# EAGLE board Board (EAGLE 9.6.2)
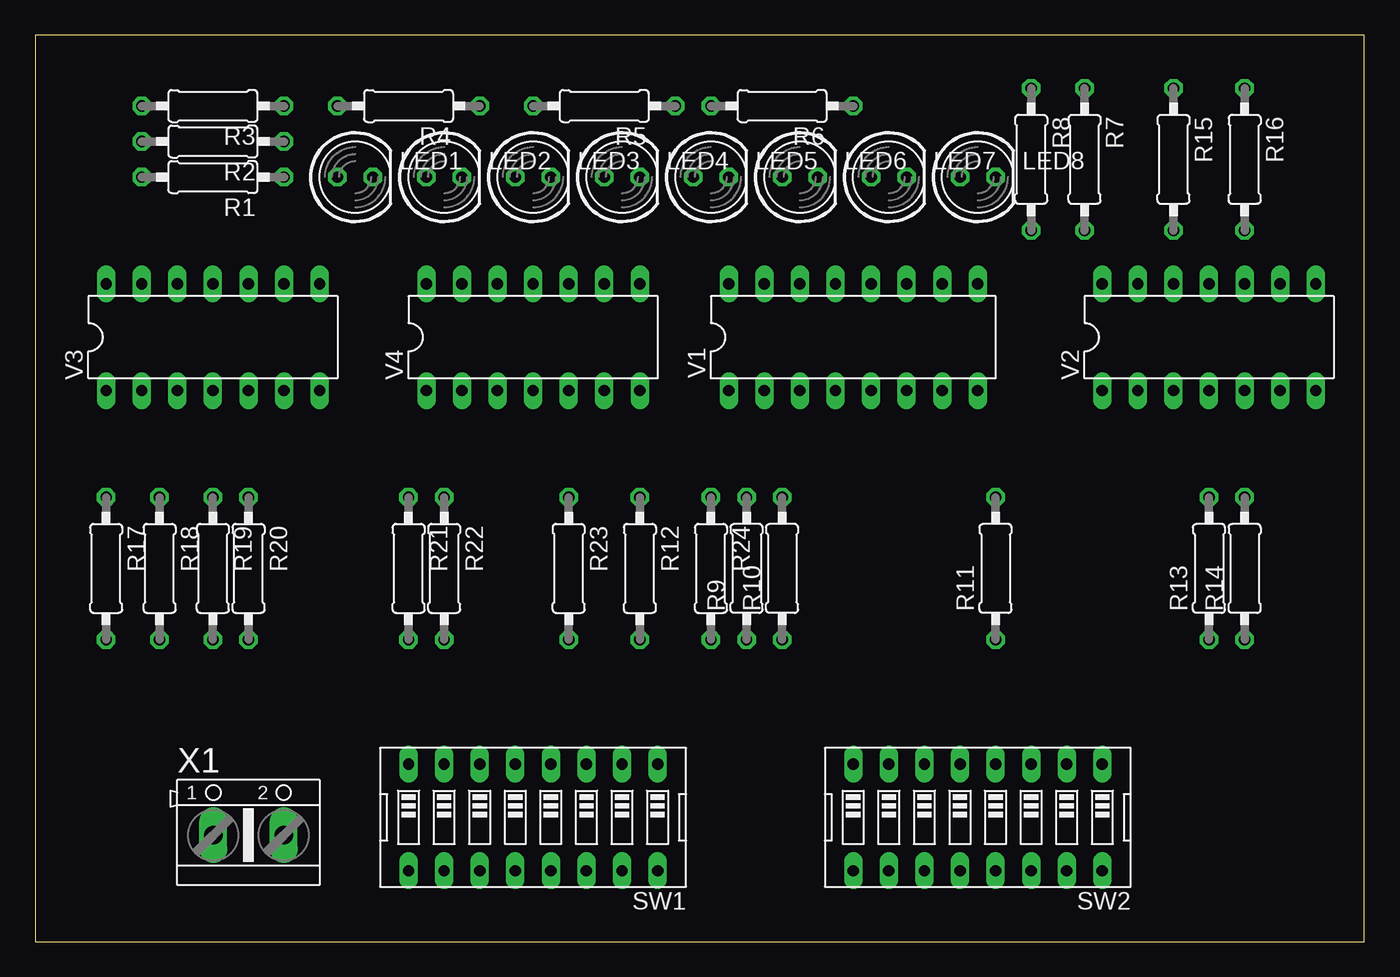
[diagram p0: board, top side]
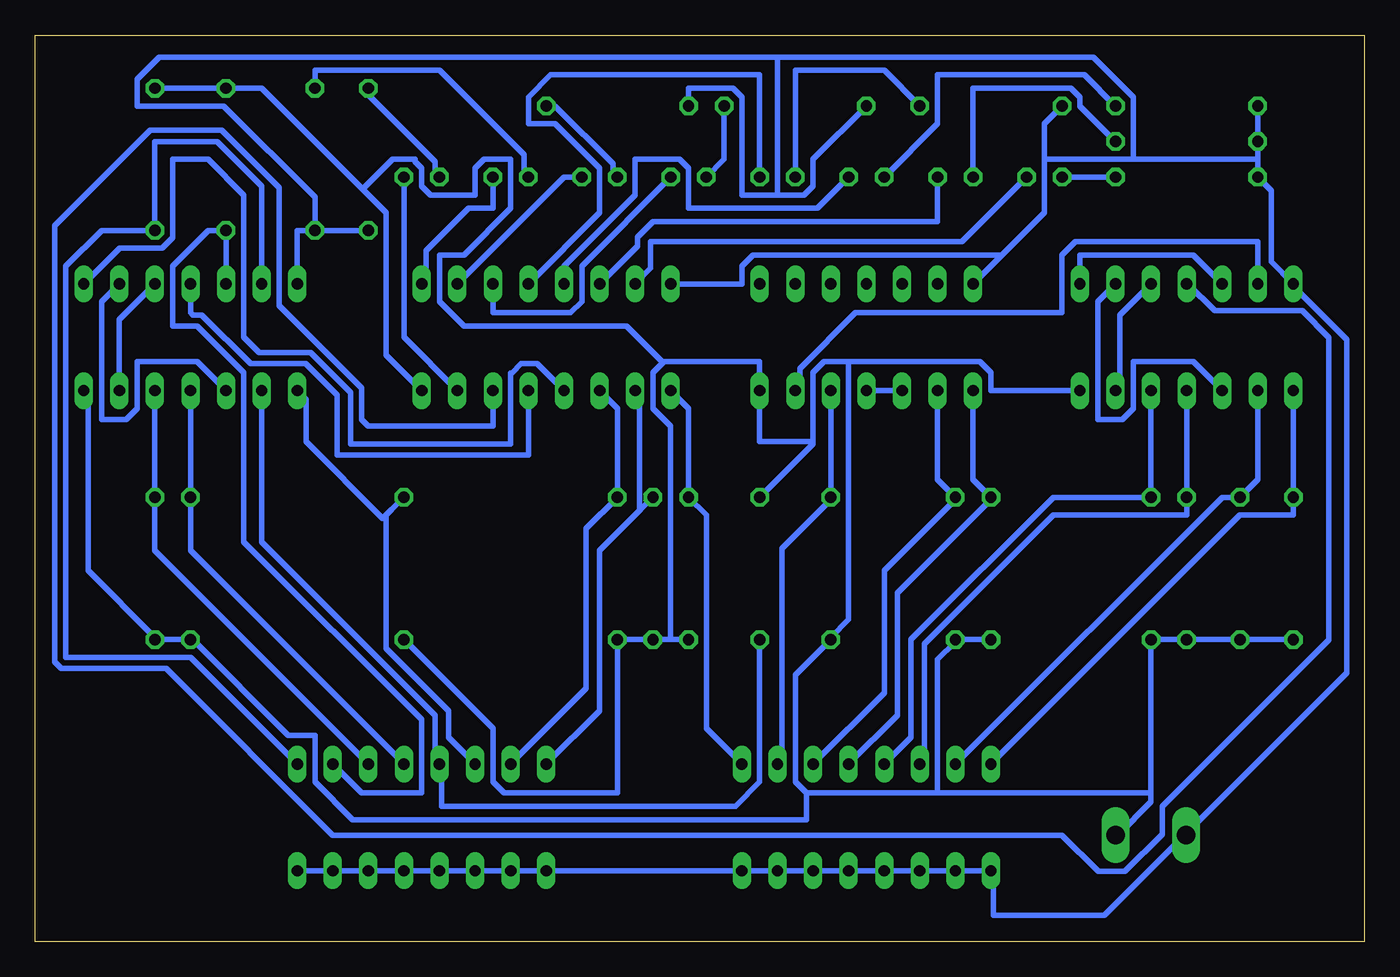
[diagram p1: board, bottom side, seen from below]

Size 94.92 x 64.76 mm. Coordinates in mm from the lower left corner, seen from the top.
Outline: 0,0 94.92,0 94.92,64.76 0,64.76 0,0
Copper layers (1*16): Top 0.035mm / dielectric 1.5mm / Bottom 0.035mm
Design rules "default *": minimum track width 0.4mm, minimum drill 0.35mm, track to track 0.4mm, track to pad 0.4mm, pad to pad 0.4mm, via to via 0.4mm, smd to smd 6mil, copper to edge 40mil, drill to drill 6mil, minimum pad ring 10mil, minimum via ring 8mil, stop-mask expansion 4mil, vias tented up to drill 0mil, thermal gap 10mil

## Footprints (pad centres in the part's own frame; a part is rotated, then mirrored left to right if it is on the bottom)
LED5MM = drill 0.813 octagon: A -1.27,0; K 1.27,0
0207/10 = drill 0.813 octagon: 1 -5.08,0; 2 5.08,0
EDG-08 = drill 0.813 long: 1 -8.89,-3.81; 2 -6.35,-3.81; 3 -3.81,-3.81; 4 -1.27,-3.81; 5 1.27,-3.81; 6 3.81,-3.81; 7 6.35,-3.81; 8 8.89,-3.81; 9 8.89,3.81; 10 6.35,3.81; 11 3.81,3.81; 12 1.27,3.81; 13 -1.27,3.81; 14 -3.81,3.81; 15 -6.35,3.81; 16 -8.89,3.81
DIL16 = drill 0.813 long: 1 -8.89,-3.81; 2 -6.35,-3.81; 3 -3.81,-3.81; 4 -1.27,-3.81; 5 1.27,-3.81; 6 3.81,-3.81; 7 6.35,-3.81; 8 8.89,-3.81; 9 8.89,3.81; 10 6.35,3.81; 11 3.81,3.81; 12 1.27,3.81; 13 -1.27,3.81; 14 -3.81,3.81; 15 -6.35,3.81; 16 -8.89,3.81
DIL14 = drill 0.813 long: 1 -7.62,-3.81; 2 -5.08,-3.81; 3 -2.54,-3.81; 4 0,-3.81; 5 2.54,-3.81; 6 5.08,-3.81; 7 7.62,-3.81; 8 7.62,3.81; 9 5.08,3.81; 10 2.54,3.81; 11 0,3.81; 12 -2.54,3.81; 13 -5.08,3.81; 14 -7.62,3.81
AK500/2 = drill 1.321 long: 1 -2.515,0; 2 2.515,0

## Placement (x,y rotation side)
LED1  [LED5MM]  22.86,54.61 0 top
LED2  [LED5MM]  29.21,54.61 0 top
LED3  [LED5MM]  35.56,54.61 0 top
LED4  [LED5MM]  41.91,54.61 0 top
LED5  [LED5MM]  48.26,54.61 0 top
LED6  [LED5MM]  54.61,54.61 0 top
LED7  [LED5MM]  60.96,54.61 0 top
LED8  [LED5MM]  67.31,54.61 0 top
R1  [0207/10]  12.7,54.61 180 top
R2  [0207/10]  12.7,57.15 180 top
R3  [0207/10]  12.7,59.69 180 top
R4  [0207/10]  26.67,59.69 180 top
R5  [0207/10]  40.64,59.69 180 top
R6  [0207/10]  53.34,59.69 180 top
R7  [0207/10]  74.93,55.88 270 top
R8  [0207/10]  71.12,55.88 270 top
R9  [0207/10]  50.8,26.67 90 top
R10  [0207/10]  53.34,26.67 90 top
R11  [0207/10]  68.58,26.67 90 top
R12  [0207/10]  43.18,26.67 270 top
R13  [0207/10]  83.82,26.67 90 top
R14  [0207/10]  86.36,26.67 90 top
R15  [0207/10]  81.28,55.88 270 top
R16  [0207/10]  86.36,55.88 270 top
R17  [0207/10]  5.08,26.67 270 top
R18  [0207/10]  8.89,26.67 270 top
R19  [0207/10]  12.7,26.67 270 top
R20  [0207/10]  15.24,26.67 270 top
R21  [0207/10]  26.67,26.67 270 top
R22  [0207/10]  29.21,26.67 270 top
R23  [0207/10]  38.1,26.67 270 top
R24  [0207/10]  48.26,26.67 270 top
SW1  [EDG-08]  35.56,8.89 180 top
SW2  [EDG-08]  67.31,8.89 180 top
V1  74138N  [DIL16]  58.42,43.18 0 top
V2  7432N  [DIL14]  83.82,43.18 0 top
V3  7408N  [DIL14]  12.7,43.18 0 top
V4  7408N  [DIL14]  35.56,43.18 0 top
X1  [AK500/2]  15.24,7.62 0 top

## Library data of the parts
LED1-LED8 = led
R1-R24 = rcl; SPICEPREFIX: R
SW1 SW2 = special
V1-V4 = 74ttl-din
X1 = con-ptr500; OC_FARNELL: unknown; OC_NEWARK: unknown

## Nets
+UB: R1.2 R2.2 R3.2 R4.2 R5.2 R6.2 R7.2 R8.2 SW1.9 SW1.10 SW1.11 SW1.12 SW1.13 SW1.14 SW1.15 SW1.16 SW2.9 SW2.10 SW2.11 SW2.12 SW2.13 SW2.14 SW2.15 SW2.16 V1.16 V2.14 V3.14 V4.14 X1.1
-UB: R9.1 R10.1 R11.1 R12.1 R13.1 R14.1 R15.1 R16.1 R17.2 R18.2 R19.2 R20.2 R21.2 R22.2 R23.2 R24.2 V1.8 V2.7 V3.7 V4.7 X1.2
N$1: V2.3 V2.9
N$2: V2.6 V2.10
N$3: V1.4 V2.8
N$4: V1.5 V2.11
N$5: V3.3 V3.9
N$6: V3.6 V3.10
N$7: V3.8 V3.12
N$8: V4.3 V4.4
N$9: V3.13 V4.6
N$10: V1.6 V3.11
N$11: R16.2 SW2.1 V2.13
N$12: R15.2 SW2.2 V2.12
N$13: R14.2 SW2.3 V2.5
N$14: R13.2 SW2.4 V2.4
N$15: R12.2 SW2.5 V2.2
N$16: R11.2 SW2.6 V2.1
N$17: R10.2 SW2.7 V1.3
N$18: R9.2 SW2.8 V1.2
N$19: R24.1 SW1.1 V1.1
N$20: R23.1 SW1.2 V4.5
N$21: R22.1 SW1.3 V4.2
N$22: R21.1 SW1.4 V4.1
N$23: R20.1 SW1.5 V3.5
N$24: R19.1 SW1.6 V3.4
N$25: R18.1 SW1.7 V3.2
N$26: R17.1 SW1.8 V3.1
N$27: LED1.K V1.15
N$28: LED2.K V1.14
N$29: LED3.K V1.13
N$30: LED4.K V1.12
N$31: LED5.K V1.11
N$32: LED6.K V1.10
N$33: LED7.K V1.9
N$34: LED8.K V1.7
N$35: LED1.A R1.1
N$36: LED2.A R2.1
N$37: LED3.A R3.1
N$38: LED4.A R4.1
N$39: LED5.A R5.1
N$40: LED6.A R6.1
N$41: LED7.A R7.1
N$42: LED8.A R8.1

## Tracks (layer width: path | path; a pad name or v marks a point on that pad's centre or on a via)
+UB
  Bottom 0.4: SW2.16 SW2.15 SW2.14 SW2.13 SW2.12 SW2.11 SW2.10 SW2.9 SW1.16 SW1.15 SW1.14 SW1.13 SW1.12 SW1.11 SW1.10 SW1.9 26.51,5.08 26.51,1.91 18.57,1.91 12.86,7.62 X1.1 12.7,7.78 1.27,19.21 1.27,43.02 5.08,46.83 V3.14 6.67,48.58 6.67,53.66 R1.2 7.62,55.88 | 7.62,55.88 R2.2 R3.2 | R4.2 22.86,58.42 22.86,55.88 | 22.86,55.88 22.86,52.07 25.96,48.97 | V4.14 25.96,48.97 | V1.16 44.45,46.99 44.45,48.26 43.66,49.05 26.04,49.05 25.96,48.97 | 22.86,55.88 16.51,55.88 | 16.51,55.88 7.62,55.88 | R7.2 76.2,50.8 V2.14 | R7.2 R8.2 | R5.2 39.37,55.88 39.37,53.98 40,53.34 41.91,53.34 | 41.91,53.34 44.45,53.34 44.45,60.33 45.09,60.96 48.26,60.96 R6.2 | R7.2 74.93,53.18 81.44,59.69 87.63,59.69 87.63,61.59 86.04,63.18 41.91,63.18 | 41.91,53.34 41.91,63.18 | 16.51,55.88 16.51,60.33 19.37,63.18 41.91,63.18
-UB
  Bottom 0.4: V1.8 69.85,41.91 69.85,52.07 71.52,53.74 | 71.52,53.74 78.74,60.96 R15.1 R16.1 | 49.53,21.59 R9.1 R10.1 53.34,10.64 61.44,10.64 62.23,11.43 62.23,15.24 R11.1 | 49.53,21.59 R24.2 | V3.7 26.67,39.37 26.67,40.64 27.46,41.43 36.83,41.43 | 36.83,41.43 38.58,41.43 39.37,40.64 39.37,35.72 | 39.37,35.72 39.37,35.56 R12.1 | 39.37,35.72 43.18,35.72 V4.7 43.18,41.43 50.01,41.43 50.09,41.35 | 49.53,21.59 49.53,36.83 50.8,38.1 50.8,40.64 50.09,41.35 | 71.52,53.74 69.37,55.88 67.79,55.88 67.79,55.72 67.31,55.24 67.31,53.98 66.67,53.34 63.5,53.34 63.5,55.24 62.86,55.88 60.96,55.88 60.96,52.39 64.29,49.05 66.04,49.05 66.04,45.72 64.29,43.97 52.7,43.97 50.09,41.35 | V2.7 91.12,39.05 91.12,26.51 86.36,21.75 R14.1 R13.1 83.66,21.59 76.83,14.76 74.93,14.76 74.93,11.43 72.23,8.73 39.85,8.73 39.85,10.64 | R21.2 R22.2 29.21,21.43 30.48,20.16 30.48,10.64 | 39.85,10.64 40.64,11.43 40.64,19.05 R23.2 38.1,21.75 36.83,23.02 36.83,41.43 | 30.48,10.64 39.85,10.64 | R17.2 R18.2 R19.2 R20.2 15.24,10.64 | 15.24,10.64 15.24,10 17.62,7.62 X1.2 | 15.24,10.64 30.48,10.64
N$1
  Bottom 0.4: V2.3 83.34,41.43 87.63,41.43 87.63,38.1 88.42,37.31 90.17,37.31 90.17,45.72 V2.9
N$2
  Bottom 0.4: V2.10 88.9,44.45 V2.6
N$3
  Bottom 0.4: V2.8 88.89,49.54 85.84,49.54 85.09,50.29 85.09,55.88 82.55,55.88 80.01,53.34 80.01,43.18 78.92,42.09 75.25,42.09 72.39,39.23 72.39,35.57 60.96,35.57 60.96,40.63 60.87,40.63 60.21,41.29 59.07,41.29 V1.4
N$4
  Bottom 0.4: V1.5 59.69,34.77 73.34,34.77 73.34,39.05 75.58,41.29 79.53,41.29 83.01,44.77 83.67,44.77 83.82,44.93 V2.11
N$5
  Bottom 0.4: V3.3 12.22,41.43 16.51,41.43 16.51,38.1 17.3,37.31 19.05,37.31 19.05,45.72 V3.9
N$6
  Bottom 0.4: V3.6 17.46,39.69 17.46,44.77 V3.10
N$7
  Bottom 0.4: V3.12 12.22,49.05 20.32,49.05 V3.8
N$8
  Bottom 0.4: V4.4 V4.3
N$9
  Bottom 0.4: V4.6 40.32,39.69 40.32,40.96 36.35,44.93 21.59,44.93 21.59,49.05 20.64,50.01 7.62,50.01 V3.13
N$10
  Bottom 0.4: V1.6 62.23,36.83 71.12,36.83 71.59,37.3 71.59,39.56 77.48,45.45 77.48,53.85 81.58,57.95 86.69,57.95 93.51,51.13 93.51,19.99 93.04,19.52 85.56,19.52 73.66,7.62 21.59,7.62 19.01,5.04 17.1,5.04 14.44,7.7 14.44,9.69 2.55,21.58 2.55,43.17 4.45,45.07 10.68,45.07 12.6,46.99 V3.11
N$11
  Bottom 0.4: SW2.1 83.82,20.32 92.71,20.32 92.71,48.26 90.17,50.8 R16.2 86.36,57.15 81.91,57.15 78.74,53.98 V2.13
N$12
  Bottom 0.4: SW2.2 71.6,10.64 67.31,10.64 67.31,15.88 80.01,28.57 80.01,40.64 83.34,43.97 85.09,43.97 85.09,48.26 82.55,50.8 R15.2 V2.12
N$13
  Bottom 0.4: SW2.3 86.36,27.94 R14.2 V2.5
N$14
  Bottom 0.4: SW2.4 83.82,27.94 R13.2 V2.4
N$15
  Bottom 0.4: V2.2 78.74,28.57 66.36,16.19 66.36,13.02 SW2.5 65.88,12.7 65.88,9.68 44.93,9.68 43.18,11.43 R12.2
N$16
  Bottom 0.4: SW2.6 65.41,14.61 65.41,16.51 69.85,20.95 69.85,30.48 | R11.2 69.45,30.88 69.85,30.48 | 69.85,30.48 70.09,30.24 75.56,35.72 75.56,38.73 V2.1
N$17
  Bottom 0.4: SW2.7 55.56,18.1 55.56,29.53 R10.2 53.34,38.1 V1.3
N$18
  Bottom 0.4: SW2.8 54.61,16.51 54.61,27.94 51.67,30.88 | R9.2 51.67,30.88 | V1.2 51.75,39.05 51.75,30.96 51.67,30.88
N$19
  Bottom 0.4: SW1.1 46.99,15.24 46.99,30.48 R24.1 48.26,38.1 V1.1
N$20
  Bottom 0.4: V4.5 R23.1 38.1,31.59 41.59,28.1 41.59,13.02 SW1.2
N$21
  Bottom 0.4: V4.2 30.48,33.02 R22.1 29.21,31.59 34.29,26.51 34.29,17.78 SW1.3
N$22
  Bottom 0.4: V4.1 27.94,33.02 R21.1 26.67,31.59 33.34,24.92 33.34,16.19 SW1.4
N$23
  Bottom 0.4: V3.5 R20.1 22.23,31.75 32.38,21.59 32.38,14.61 SW1.5
N$24
  Bottom 0.4: V3.4 R19.1 12.7,30.48 22.23,30.48 31.43,21.27 31.43,13.02 SW1.6
N$25
  Bottom 0.4: V3.2 7.62,33.02 R18.1 10.16,31.75 SW1.7
N$26
  Bottom 0.4: V3.1 R17.1 5.08,30.48 8.89,30.48 SW1.8
N$27
  Bottom 0.4: LED1.K 28.73,50.01 50.96,50.01 50.96,48.1 V1.15
N$28
  Bottom 0.4: V1.14 51.91,49.69 51.91,50.32 50.8,51.44 30.48,51.44 LED2.K
N$29
  Bottom 0.4: LED3.K 39.05,52.39 48.26,52.39 48.26,55.24 48.89,55.88 52.07,55.88 52.07,53.34 57.15,48.26 V1.13
N$30
  Bottom 0.4: V1.12 54.61,52.07 54.61,55.24 57.78,58.42 59.69,58.42 59.69,60.33 58.1,61.91 43.18,61.91 LED4.K
N$31
  Bottom 0.4: LED5.K 55.88,48.26 55.88,45.72 56.67,44.93 62.23,44.93 V1.11
N$32
  Bottom 0.4: V1.10 57.15,54.61 LED6.K
N$33
  Bottom 0.4: V1.9 66.99,47.31 66.99,49.37 63.98,52.39 62.23,52.39 LED7.K
N$34
  Bottom 0.4: V1.7 68.58,43.18 LED8.K
N$35
  Bottom 0.4: LED1.A R1.1
N$36
  Bottom 0.4: R2.1 20.32,59.69 20.32,60.33 20.96,60.96 27.94,60.96 LED2.A
N$37
  Bottom 0.4: R3.1 20,61.91 30.48,61.91 30.48,58.42 LED3.A
N$38
  Bottom 0.4: R4.1 34.29,62.23 40.64,62.23 LED4.A
N$39
  Bottom 0.4: LED5.A 45.72,55.88 R5.1
N$40
  Bottom 0.4: LED6.A 53.66,54.93 53.66,55.56 57.78,59.69 R6.1
N$41
  Bottom 0.4: LED7.A 60.01,54.93 60.01,56.2 66.04,62.23 74.93,62.23 R7.1
N$42
  Bottom 0.4: LED8.A 66.36,54.93 66.36,55.72 71.12,60.48 R8.1